# Altium PCB Modulo_Generico.PcbDoc
Units mm, origin at the board's own origin, x right, y up, seen from the top; angles counter-clockwise.
Board outline 152.4 x 101.6 mm, 2 copper layers (Top Layer, Bottom Layer); 29 components, 40 nets, 131 pads, 6 vias.
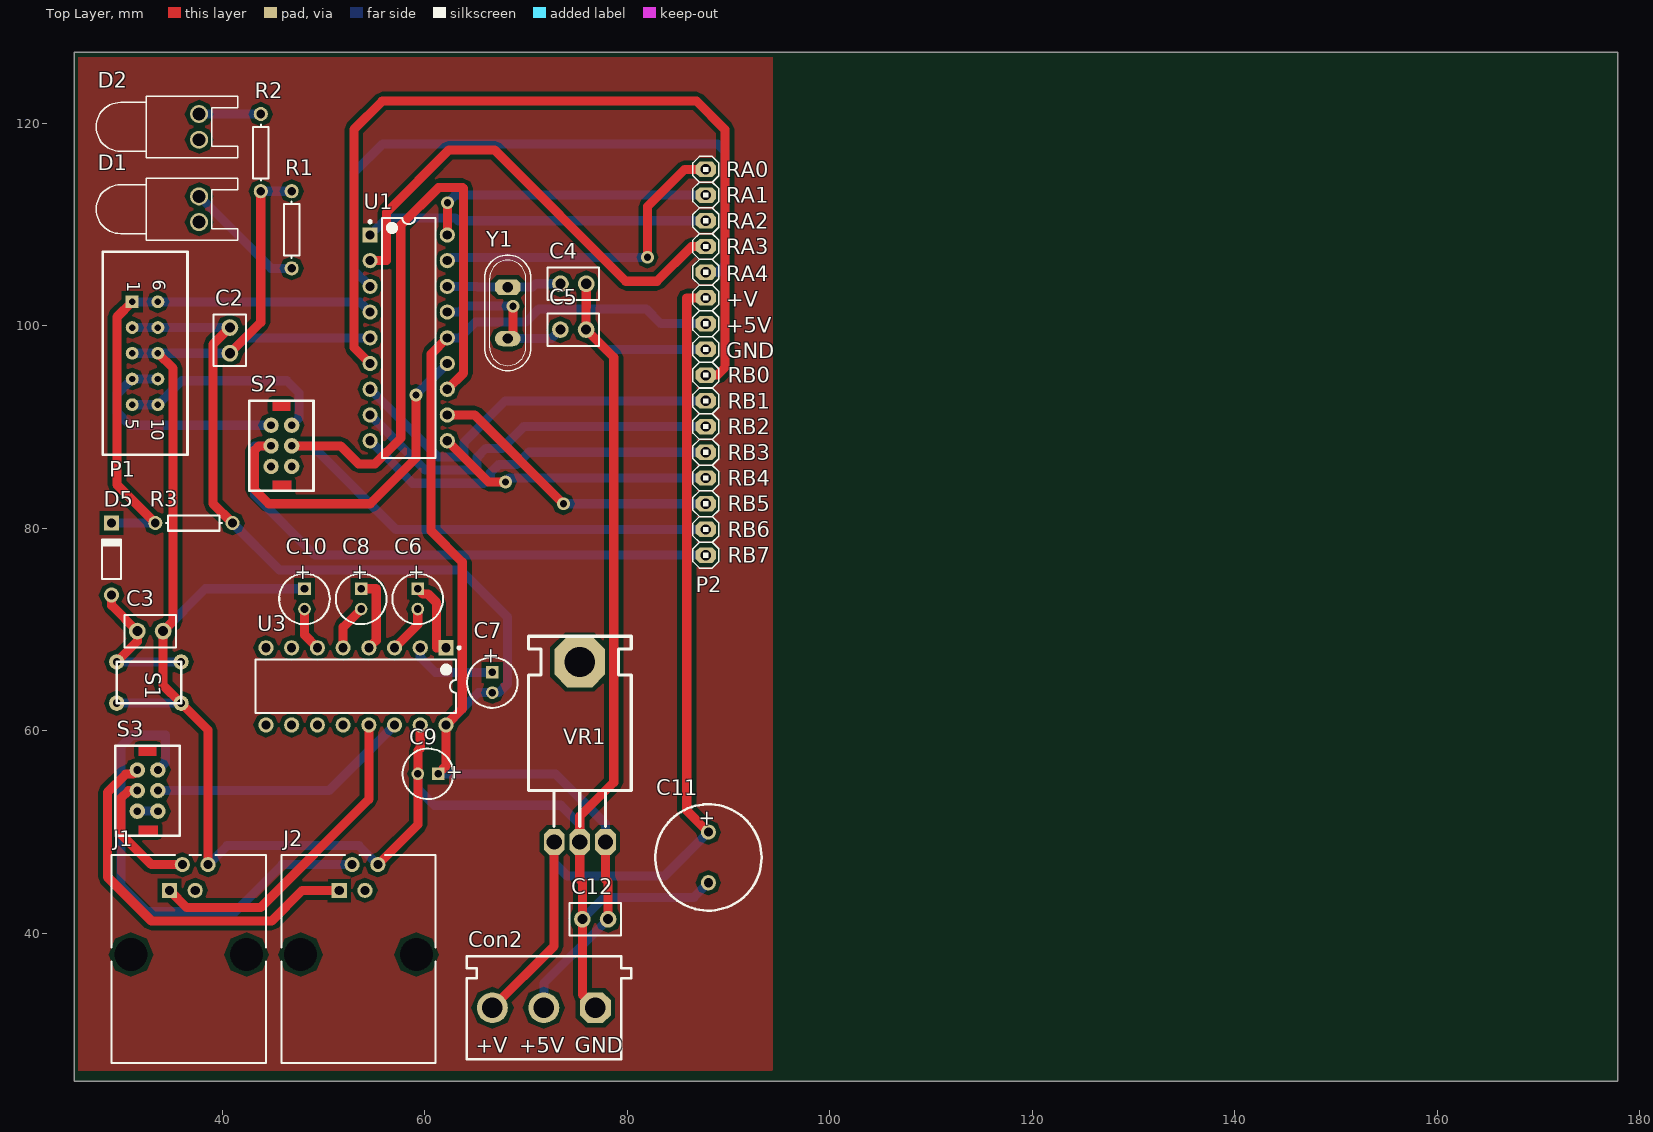
[diagram p0: Top Layer view]
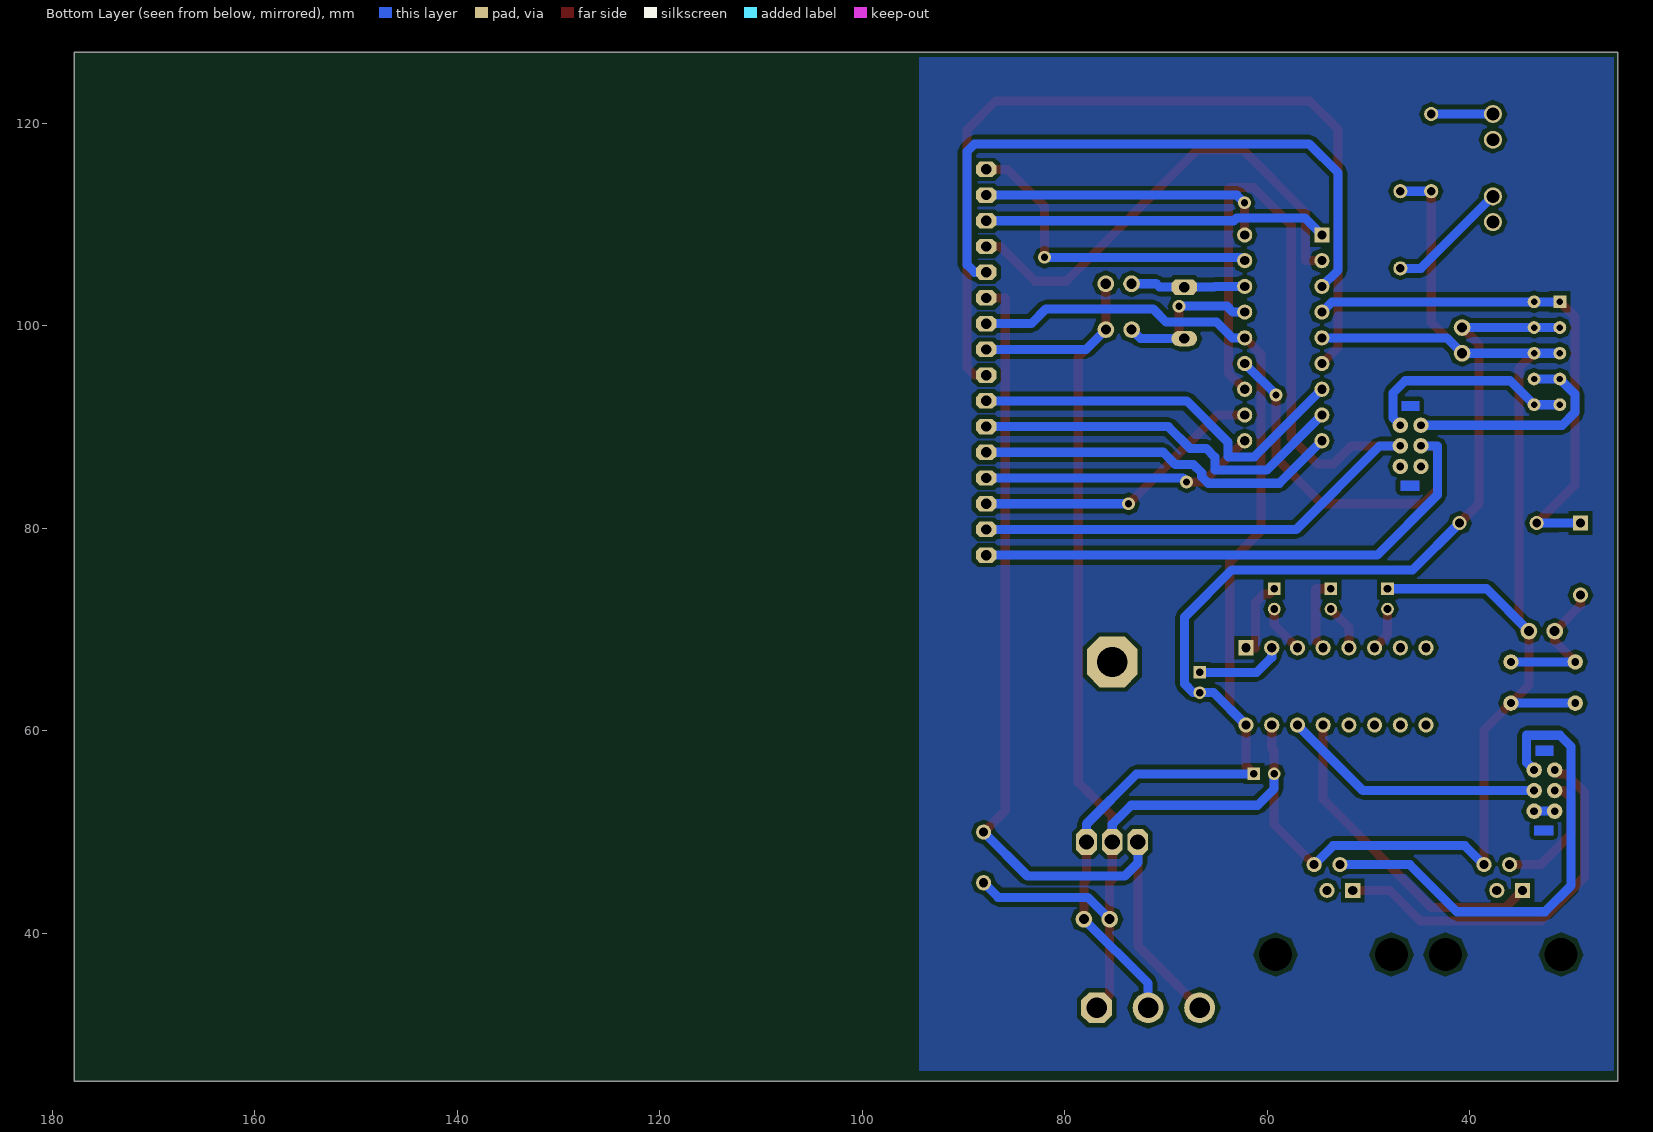
[diagram p1: Bottom Layer view, seen from below]

## Layer stack, top to bottom
Top Layer: signal copper 0.0356
Dielectric: dielectric 0.32, FR-4, Dk 4.8
Bottom Layer: signal copper 0.0356

## Board outline
25.4,25.4 177.8,25.4 177.8,127 25.4,127

## Design rules (kind name [scope] priority, off if disabled: settings)
Clearance [All] p1: gap=0.4
PolygonConnect [All] p1: connectstyle=Relief reliefconductorwidth=0.254 reliefentries=4 polygonreliefangle="90 Angle"
RoutingVias [All] p1: holewidth=0.711 width=1.27 viastyle="Through Hole" minholewidth=0.711 minwidth=1.27 maxholewidth=0.711 maxwidth=1.27
SilkscreenOverComponentPads [All] p1: minsilkscreentomaskgap=0.254
SolderMaskExpansion [All] p1: expansion=0.102
Width [All] p1: maxlimit=1 minlimit=0.254 preferedwidth=0.9 minimp=50.000000 maximp=50.000000 favimp=50.000000
27 further rules are at their usual default settings.

## Components (designator, comment, footprint, x,y, rotation, side; value= is the part's Value field where it differs from the comment)
C2 "Cap" CAPR2.54-5.1x3.2 40.767,98.552 r90 top
C3 "Cap" CAPR2.54-5.1x3.2 32.893,69.85 r180 top
C4 "Cap" CAPR2.54-5.1x3.2 74.676,104.14 r180 top
C5 "Cap" CAPR2.54-5.1x3.2 74.666,99.619 r180 top
C6 "Cap Pol1" CAPPR2-5x6.8 59.309,73.025 r270 top
C7 "Cap Pol1" CAPPR2-5x6.8 66.675,64.77 r270 top
C8 "Cap Pol1" CAPPR2-5x6.8 53.721,73.025 r270 top
C9 "Cap Pol1" CAPPR2-5x6.8 60.325,55.753 r180 top
C10 "Cap Pol1" CAPPR2-5x6.8 48.133,73.025 r270 top
C11 "Cap Pol1" RB5-10.5 88.011,47.498 r270 top
C12 "Cap" CAPR2.54-5.1x3.2 76.835,41.402 r0 top
Con2 "POWER_A" My_CN3 79.375,27.559 r180 top
D1 "LED0" LED-0 37.719,111.506 r270 top
D2 "LED0" LED-0 37.719,119.634 r270 top
D5 "Diode 1N4148" DIO7.1-3.9x1.9 29.083,76.962 r90 top
J1 "SERIAL A" 15-43-6245 36.703,27.178 r0 top
J2 "SERIAL B" 15-43-6245 53.467,27.178 r0 top
P1 "ICD2" HEADER10_5x2_B 32.385,97.282 r270 top
P2 "Header 16" My_1X16 87.757,96.393 r270 top
R1 "Res1" AXIAL-0.3 46.863,109.474 r90 top
R2 "Res1" AXIAL-0.3 43.815,117.094 r270 top
R3 "Res1" AXIAL-0.3 37.211,80.518 r0 top
S1 "SW-PB" TS-063 32.766,64.77 r270 top
S2 "PROGRAM SELECTION" LD-202mini 45.847,88.138 r270 top
S3 "SERIAL CHAIN" LD-202mini 32.639,54.102 r270 top
U1 "PIC16F88" PDIP300-P18 58.42,98.806 r0 top
U3 "MAX232" PE16A 53.213,64.389 r270 top
VR1 "7805" My_TO-220 72.784,49.035 r0 top
Y1 "20MHz" My_Crystal 68.199,101.27 r270 top

## Footprints (in the part's own frame and the unit in brackets; to place one, negate y for a bottom-side part, rotate by r counter-clockwise, add the part's x,y. Pads: shape width x height; smd on the part's side, far side on the other; paste and mask are expansions set on the pad)
15-43-6245 [mm] "Connector; PCB Jack, Thru-Hole; 1-Port; Unshielded without Lightpipes; Right Angle"
  rect 1.5x1.5 hole 0.9: 1(-1.905,17.07)
  round 1.5 hole 0.9: 2(-0.635,19.61) 3(0.635,17.07) 4(1.905,19.61)
  round 2.95 hole 3.25 unplated: MH1(-5.715,10.72) MH2(5.715,10.72)
  silkscreen extent -7.62,0 7.62,20.57
AXIAL-0.3 [mm] "Axial Device, Thru-Hole; 2 Leads; 0.3 in Pin Spacing"
  round 1.4 hole 0.85: 1(-3.81,0) 2(3.81,0)
  silkscreen extent -2.77,-0.76 2.77,0.76
CAPPR2-5x6.8 [mm] "Capacitor, Electrolytic, Radial; Body 5 x 6.8 mm (Dia.xH typ); Pin Spacing 2 mm (typ)"
  rect 1.25x1.25 hole 0.75: 1(-1,0)
  round 1.25 hole 0.75: 2(1,0)
  silkscreen extent -2.5,-2.5 2.5,2.5
CAPR2.54-5.1x3.2 [mm] "Capacitor, Ceramic, Thru-Hole, Dipped Radial; Body 5.1 x 3.2 mm (WxT) Pin Spacing 2.54 mm (typ)"
  round 1.65 hole 1: 1(-1.27,0) 2(1.27,0)
  silkscreen extent -2.55,-1.6 2.55,1.6
DIO7.1-3.9x1.9 [mm] "Diode, Axial; Body 3.8 x 1.9 mm (LxDia. max), Lead Dia. 0.53 mm (max)"
  round 1.5 hole 0.9: 1(-3.55,0)
  rect 1.5x1.5 hole 0.9: 2(3.55,0)
  silkscreen extent -1.95,-0.95 2.05,0.95
HEADER10_5x2_B [mm] "Header con polaridad para 10 pines (5x2)"
  rect 1.27x1.27 hole 0.635: 1(-5.08,-1.27)
  round 1.27 hole 0.635: 2(-2.54,-1.27) 3(0,-1.27) 4(2.54,-1.27) 5(5.08,-1.27) 6(-5.08,1.27) 7(-2.54,1.27) 8(0,1.27) 9(2.54,1.27) 10(5.08,1.27)
  silkscreen extent -10.03,-4.19 10.03,4.19
LD-202mini [mil] "Doble inversor mini 90 grados"
  round 60 hole 30: 1(0,40) 2(-80,40) 3(80,40) 4(0,-40) 5(-80,-40) 6(80,-40)
  Multi-Layer region: 135,-35 175,-35 175,40 135,40
  Multi-Layer region: -175,-35 -135,-35 -135,35 -175,35
  silkscreen extent -175,-125 175,125
LED-0 [mil] "Typical INFRARED GaAs LED; 2 Leads"
  round 70 hole 50: 1(50,0) 2(-50,0)
  silkscreen extent -120,-400 120,150
My_1X16 [mil]
  oct 60x80 hole 40: 1(-750,0) 2(-650,0) 3(-550,0) 4(-450,0) 5(-350,0) 6(-250,0) 7(-150,0) 8(-50,0) 9(50,0) 10(150,0) 11(250,0) 12(350,0) 13(450,0) 14(550,0) 15(650,0) 16(750,0)
  silkscreen extent -800,-50 800,50
My_CN3 [mil]
  oct 120x120 hole 80: 1(99.5,-200.5)
  round 120 hole 80: 2(299.5,-200.5) 3(499.5,-200.5)
  silkscreen extent -40,-400 600,0
My_Crystal [mil]
  oct 60x100 hole 40: 1(-100,0)
  oval 60x100 hole 40: 2(100,0)
  silkscreen extent -225,-90 225,90
My_TO-220 [mil]
  oct 196.85x196.85 hole 118.11: 0(99.49,699.49)
  oct 80x100 hole 60: 1(-0.5,-0.5) 2(99.5,-0.5) 3(199.5,-0.5)
  silkscreen extent -100,60 300,800
PDIP300-P18 [mm] "DIP, 18-Leads, Row Spacing 7.62mm, Pitch 2.54mm, Body 22.9x6.6mm"
  rect 1.5x1.5 hole 0.9: 1(-3.81,10.16)
  round 1.5 hole 0.9: 2(-3.81,7.62) 3(-3.81,5.08) 4(-3.81,2.54) 5(-3.81,0) 6(-3.81,-2.54) 7(-3.81,-5.08) 8(-3.81,-7.62) 9(-3.81,-10.16) 10(3.81,-10.16) 11(3.81,-7.62) 12(3.81,-5.08) 13(3.81,-2.54) 14(3.81,0) 15(3.81,2.54) 16(3.81,5.08) 17(3.81,7.62) 18(3.81,10.16)
  silkscreen extent -3.93,-11.85 2.65,11.85, body extent -3.6,-11.8 3.6,11.8, height 5.34
PE16A [mm] "DIP, 16-Leads, Row Spacing 7.62mm, Pitch 2.54mm, Body 19.18x6.99mm"
  rect 1.5x1.5 hole 0.9: 1(-3.81,8.89)
  round 1.5 hole 0.9: 2(-3.81,6.35) 3(-3.81,3.81) 4(-3.81,1.27) 5(-3.81,-1.27) 6(-3.81,-3.81) 7(-3.81,-6.35) 8(-3.81,-8.89) 9(3.81,-8.89) 10(3.81,-6.35) 11(3.81,-3.81) 12(3.81,-1.27) 13(3.81,1.27) 14(3.81,3.81) 15(3.81,6.35) 16(3.81,8.89)
  silkscreen extent -3.93,-9.9 2.65,10.32, body extent -3.3,-9.9 3.3,9.9, height 5.08
RB5-10.5 [mm] "Motor, General Kind; 2 Leads"
  round 1.5 hole 0.9: 1(-2.5,0) 2(2.5,0)
  silkscreen extent -5.25,-5.25 5.25,5.25
TS-063 [mil] "Boton normal abierto"
  round 60 hole 30: 1(80,125) 1(80,-125) 2(-80,125) 2(-80,-125)
  silkscreen extent -80,-125 80,125

## Part data
C2 C3 C4 C5 C12: "Capacitor"
C6 C7 C8 C9 C10 C11: "Polarized Capacitor (Radial)"
Con2: library part "CON3 pin Green", "Connector green screw"
D1 D2: "Typical INFRARED GaAs LED"
D5: "High Conductance Fast Diode"
J1 J2: library part 15-43-6245, "Right Angle, Standard Profile, RJ45-Keyed, Flange Mount PCB Jack"
P1: library part "Header 5X2A", "Header, 5-Pin, Dual row"
P2: "Header, 16-Pin"
R1 R2 R3: "Resistor"
S1: "Switch"
S2 S3: library part SW-DPDT, "Double-Pole, Double-Throw Switch"
U1: library part PIC16F88-E/P, "Enhanced FLASH Microcontroller with nanoWatt Technology, 10-Bit A/D, 4K (x14-Bit words) FLASH, 368 Bytes RAM, 18-Pin PDIP, Standard VDD Range, Extended Temperature"
U3: library part MAX232ACPE, "+5V Powered, Multi-Channel RS-232 Driver/Receiver"
VR1: library part "Volt Reg", "Voltage Regulator"
Y1: library part XTAL, "Crystal Oscillator"

## Via types
v1: diameter 1.27, hole 0.711, Top Layer to Bottom Layer, 6 vias

## Nets (pads, with @x,y where several pads share a name; then routed paths per layer and width w, separated by ;. In a path a pad name is that pad's centre, name@x,y a point inside that pad or via, vN(x,y) a via of type N, cw(c..) or ccw(c..) an arc to the next point about the centre after c; other vN are vias at no path point)
"+5V VCC": C2.2 C7.2 C9.1 C12.2 Con2.2 P1.2 P1.7 P2.7 R3.2 U1.14 U3.16 VR1.3 | length 188.5
  Top Layer w0.9: C2.2 39.091,98.146 39.091,82.448 R3.2 ; C9.1 62.103,56.531 U3.16 63.703,62.179 63.703,76.657 60.63,79.731 60.63,97.206 U1.14 ; VR1.3 77.851,45.339 78.105,45.085 C12.2
  Bottom Layer w0.9: P1.2 P1.7 C2.2 ; R3.2 45.644,75.895 63.5,75.895 68.174,71.222 68.174,64.634 67.31,63.77 C7.2 65.294,63.77 U3.16 ; C9.1 72.898,55.753 77.851,50.8 VR1.3 ; U1.14 63.451,98.806 65,100.355 69.977,100.355 71.272,101.651 81.864,101.651 83.312,100.203 P2.7 ; Con2.2 71.768,35.065 C12.2
"+V LOGIC": C11.1 Con2.3 P2.6 VR1.1 | length 94
  Top Layer w0.9: Con2.3 72.771,38.735 VR1.1 ; P2.6 85.877,102.743 85.877,52.132 C11.1
  Bottom Layer w0.9: VR1.1 72.771,46.99 74.092,45.669 83.682,45.669 C11.1
GND: C2.1 C3.1 C4.1 C5.1 C9.2 C10.1 C11.2 C12.1 Con2.1 J1.4 J2.4 P1.3 P1.8 P2.8 R1.2 R2.2 S1.1 U1.5 U3.15 VR1.2 | length 275.6
  Top Layer w0.9: P1.8 35.154,95.783 35.154,70.841 C3.1 34.163,64.516 35.941,62.738 38.608,60.071 J1.4 ; C2.1 43.815,100.33 R2.2 ; J2.4 59.325,50.741 C9.2 59.325,58.039 59.563,58.277 U3.15 ; C4.1 75.946,101.864 75.936,101.854 C5.1 78.664,96.891 78.664,54.914 75.311,51.562 VR1.2 75.311,45.339 75.565,45.085 C12.1 75.565,33.934 Con2.1
  Bottom Layer w0.9: S1.1@29.591,62.738 S1.1@35.941,62.738 ; P1.3 P1.8 C2.1 42.291,98.806 U1.5 ; C3.1 38.338,74.025 C10.1 ; J1.4 40.486,48.666 53.494,48.666 J2.4 ; R2.2 R1.2 ; C9.2 59.325,54.289 60.96,52.654 73.431,52.654 75.311,50.774 VR1.2 ; C12.1 77.724,43.561 86.574,43.561 C11.2 ; C5.1 77.892,97.663 P2.8
ICD2_CLK: P1.5 P1.10 S2.2 | length 21.4
  Bottom Layer w0.9: P1.5 P1.10 36.017,94.564 46.38,94.564 47.6,93.345 47.6,90.907 S2.2
ICD2_CLK/RB6: P2.15 S2.1 U1.12 | length 106.1
  Top Layer w0.9: S2.1 51.689,88.138 53.467,86.36 55.093,86.36 57.633,88.9 57.633,109.906 61.365,113.638 63.751,113.638 63.83,113.559 63.83,95.326 U1.12
  Bottom Layer w0.9: S2.1 48.895,88.138 57.15,79.883 P2.15
ICD2_DATA: P1.4 P1.9 S2.5 | length 22.2
  Bottom Layer w0.9: P1.9 P1.4 29.616,93.243 29.616,91.44 30.886,90.17 S2.5
ICD2_DATA/RB7: P2.16 S2.4 U1.13 | length 88.2
  Top Layer w0.9: S2.4 43.637,88.138 43.205,87.706 43.205,83.82 44.602,82.423 54.621,82.423 59.131,86.934 v1(59.131,93.167)
  Bottom Layer w0.9: S2.4 43.205,88.138 43.205,83.287 49.149,77.343 P2.16 ; v1(59.131,93.167) U1.13
LED1: D1.1
LED2: D2.1
MAX_TX: S3.1 U3.14 | length 26.1
  Bottom Layer w0.9: S3.1 50.546,54.102 U3.14
MCLR: D5.2 P1.1 P1.6 R3.1 U1.4 | length 52.3
  Top Layer w0.9: P1.1 29.616,100.863 29.616,84.303 R3.1
  Bottom Layer w0.9: D5.2 31.217,80.512 31.223,80.518 R3.1 ; P1.1 P1.6 53.594,102.362 U1.4
NetC3_2: C3.2 D5.1 S1.2 | length 14.9
  Top Layer w0.9: D5.1 29.083,72.39 C3.2 31.623,68.834 S1.2@29.591,66.802
  Bottom Layer w0.9: S1.2@29.591,66.802 S1.2@35.941,66.802
NetC4_2: C4.2 U1.16 Y1.1 | length 11.3
  Bottom Layer w0.9: U1.16 65.176,103.886 65.252,103.81 Y1.1 70.637,103.81 70.967,104.14 C4.2
NetC5_2: C5.2 U1.15 Y1.2 | length 16
  Top Layer w0.9: Y1.2 68.707,98.73 v1(68.707,101.93)
  Bottom Layer w0.9: U1.15 63.398,101.346 63.983,101.93 v1(68.707,101.93) ; Y1.2 72.507,98.73 C5.2
NetC6_1: C6.1 U3.1 | length 7.8
  Top Layer w0.9: C6.1 59.826,73.508 60.325,73.508 61.163,72.669 61.163,68.199 U3.1
NetC6_2: C6.2 U3.3 | length 4.8
  Top Layer w0.9: U3.3 59.309,70.485 C6.2
NetC7_1: C7.1 U3.2 | length 8.7
  Bottom Layer w0.9: U3.2 59.563,67.259 61.052,65.77 C7.1
NetC8_1: C8.1 U3.4 | length 7.6
  Top Layer w0.9: C8.1 55.22,74.025 55.22,68.936 U3.4
NetC8_2: C8.2 U3.5 | length 4.6
  Top Layer w0.9: U3.5 51.943,70.247 C8.2
NetC10_2: C10.2 U3.6 | length 4.4
  Top Layer w0.9: C10.2 48.133,69.469 U3.6
NetD1_2: D1.2 R1.1 | length 12.1
  Bottom Layer w0.9: D1.2 44.831,105.664 R1.1
NetD2_2: D2.2 R2.1 | length 6.1
  Bottom Layer w0.9: D2.2 R2.1
NetS3_3: S3.3 S3.6 | length 2
  Bottom Layer w0.9: S3.6 S3.3
PIC_RX: U3.12
PIC_TX: U3.11
RA0: P2.1 U1.17 | length 32.2
  Top Layer w0.9: v1(81.991,106.756) 81.991,111.76 85.674,115.443 P2.1
  Bottom Layer w0.9: U1.17 62.56,106.756 v1(81.991,106.756)
RA1: P2.2 U1.18 | length 29
  Top Layer w0.9: U1.18 62.255,108.991 v1(62.255,112.141)
  Bottom Layer w0.9: v1(62.255,112.141) 63.017,112.903 P2.2
RA2: P2.3 U1.1 | length 34
  Bottom Layer w0.9: U1.1 56.3,110.656 63.017,110.656 63.31,110.363 P2.3
RA3: P2.4 U1.2 | length 47.2
  Top Layer w0.9: U1.2 56.21,106.426 56.21,111.176 62.382,117.348 66.904,117.348 79.858,104.394 82.931,104.394 86.36,107.823 P2.4
RA4: P2.5 U1.3 | length 63.4
  Bottom Layer w0.9: U1.3 53.01,105.486 53.01,115.087 55.88,117.958 88.9,117.958 89.637,117.221 89.637,106.02 88.9,105.283 P2.5
RB0: P2.9 U1.6 | length 88.4
  Top Layer w0.9: U1.6 53.01,97.866 53.01,119.38 55.804,122.174 86.843,122.174 89.637,119.38 89.637,95.86 88.9,95.123 P2.9
RB1: P2.10 U1.7 | length 39
  Bottom Layer w0.9: U1.7 61.29,87.046 63.83,87.046 63.877,87.093 63.877,88.493 67.967,92.583 P2.10
RB2: P2.11 U1.8 | length 37.9
  Bottom Layer w0.9: U1.8 60.05,85.746 65.177,85.746 65.177,87.026 66.04,87.889 67.632,87.889 69.786,90.043 P2.11
RB3: P2.12 U1.9 | length 36.4
  Bottom Layer w0.9: U1.9 58.81,84.446 65.833,84.446 66.477,85.09 66.477,85.469 67.31,86.302 69.077,86.302 70.278,87.503 P2.12
RB4: P2.13 U1.10 | length 27.4
  Top Layer w0.9: U1.10 66.294,84.582 v1(67.97,84.582)
  Bottom Layer w0.9: v1(67.97,84.582) 68.351,84.963 P2.13
RB5: P2.14 U1.11 | length 29.2
  Top Layer w0.9: U1.11 64.928,91.186 v1(73.691,82.423)
  Bottom Layer w0.9: v1(73.691,82.423) P2.14
SERIAL_A_RX: J1.2 S3.4 | length 12.8
  Top Layer w0.9: S3.4 30.759,54.102 29.997,53.34 29.997,49.811 33.02,46.788 J1.2
SERIAL_A_TX: J1.1 U3.13 | length 32.2
  Top Layer w0.9: J1.1 36.501,42.545 43.79,42.545 54.483,53.238 U3.13
SERIAL_B_RX: J2.2 S3.2 | length 48.1
  Bottom Layer w0.9: S3.2 34.392,56.871 34.392,59.563 31.115,59.563 29.997,58.445 29.997,44.729 32.588,42.139 41.275,42.139 45.924,46.788 J2.2
SERIAL_B_TX: J2.1 S3.5 | length 38.2
  Top Layer w0.9: S3.5 31.217,55.728 30.48,55.728 28.677,53.924 28.677,45.568 33.02,41.224 44.882,41.224 47.906,44.248 J2.1
pads on no net: J1.3 J1.MH1 J1.MH2 J2.3 J2.MH1 J2.MH2 S2.3 S2.6 U3.7 U3.8 U3.9 U3.10 VR1.0

## Polygon pours and split planes (outlines as drawn)
no net on Top Layer "Top Layer-No Net" (solid, pour order 1000): 25.781,126.492 25.781,26.416 94.488,26.416 94.364,26.543 94.364,126.492
no net on Bottom Layer "Top Layer-No Net" (solid, pour order 1001): 94.361,26.416 25.908,26.416 25.781,26.543 25.781,126.492 94.361,126.492

## Silkscreen, mask and mechanical layers (free items; w line width, h text height)
Top Overlay:
  text "RA0" at 89.789,114.681 h1.52
  text "RA1" at 89.789,112.141 h1.52
  text "RA2" at 89.789,109.601 h1.52
  text "RA3" at 89.789,107.061 h1.52
  text "RA4" at 89.789,104.394 h1.52
  text "+V" at 89.789,101.854 h1.52
  text "+5V" at 89.789,99.314 h1.52
  text "GND" at 89.789,96.774 h1.52
  text "RB0" at 89.916,94.361 h1.52
  text "RB1" at 89.916,91.821 h1.52
  text "RB2" at 89.916,89.281 h1.52
  text "RB3" at 89.916,86.741 h1.52
  text "RB4" at 89.916,84.201 h1.52
  text "RB5" at 89.916,81.661 h1.52
  text "RB6" at 89.916,79.121 h1.52
  text "RB7" at 89.916,76.581 h1.52
  text "+V" at 65.024,28.194 h1.52
  text "+5V" at 69.342,28.194 h1.52
  text "GND" at 74.803,28.194 h1.52

## Text inside footprints (layer, text, board x,y; h text height)
C6: Top Overlay "+" at 58.559,76.5 h1.5 r270
C7: Top Overlay "+" at 65.925,68.245 h1.5 r270
C8: Top Overlay "+" at 52.971,76.5 h1.5 r270
C9: Top Overlay "+" at 63.8,56.503 h1.5 r180
C10: Top Overlay "+" at 47.383,76.5 h1.5 r270
C11: Top Overlay "+" at 87.249,52.197 h1.5 r270
P1: Top Overlay "6" at 33.147,104.521 h1.27 r270; Top Overlay "10" at 33.02,90.805 h1.27 r270; Top Overlay "5" at 30.48,90.805 h1.27 r270; Top Overlay "1" at 30.607,104.394 h1.27 r270